# Altium PCB PCBpuissance.PcbDoc
Units mm, origin at the board's own origin, x right, y up, seen from the top; angles counter-clockwise.
Board outline 127 x 101.6 mm, 2 copper layers (Top Layer, Bottom Layer); 28 components, 13 nets, 77 pads, 0 vias.
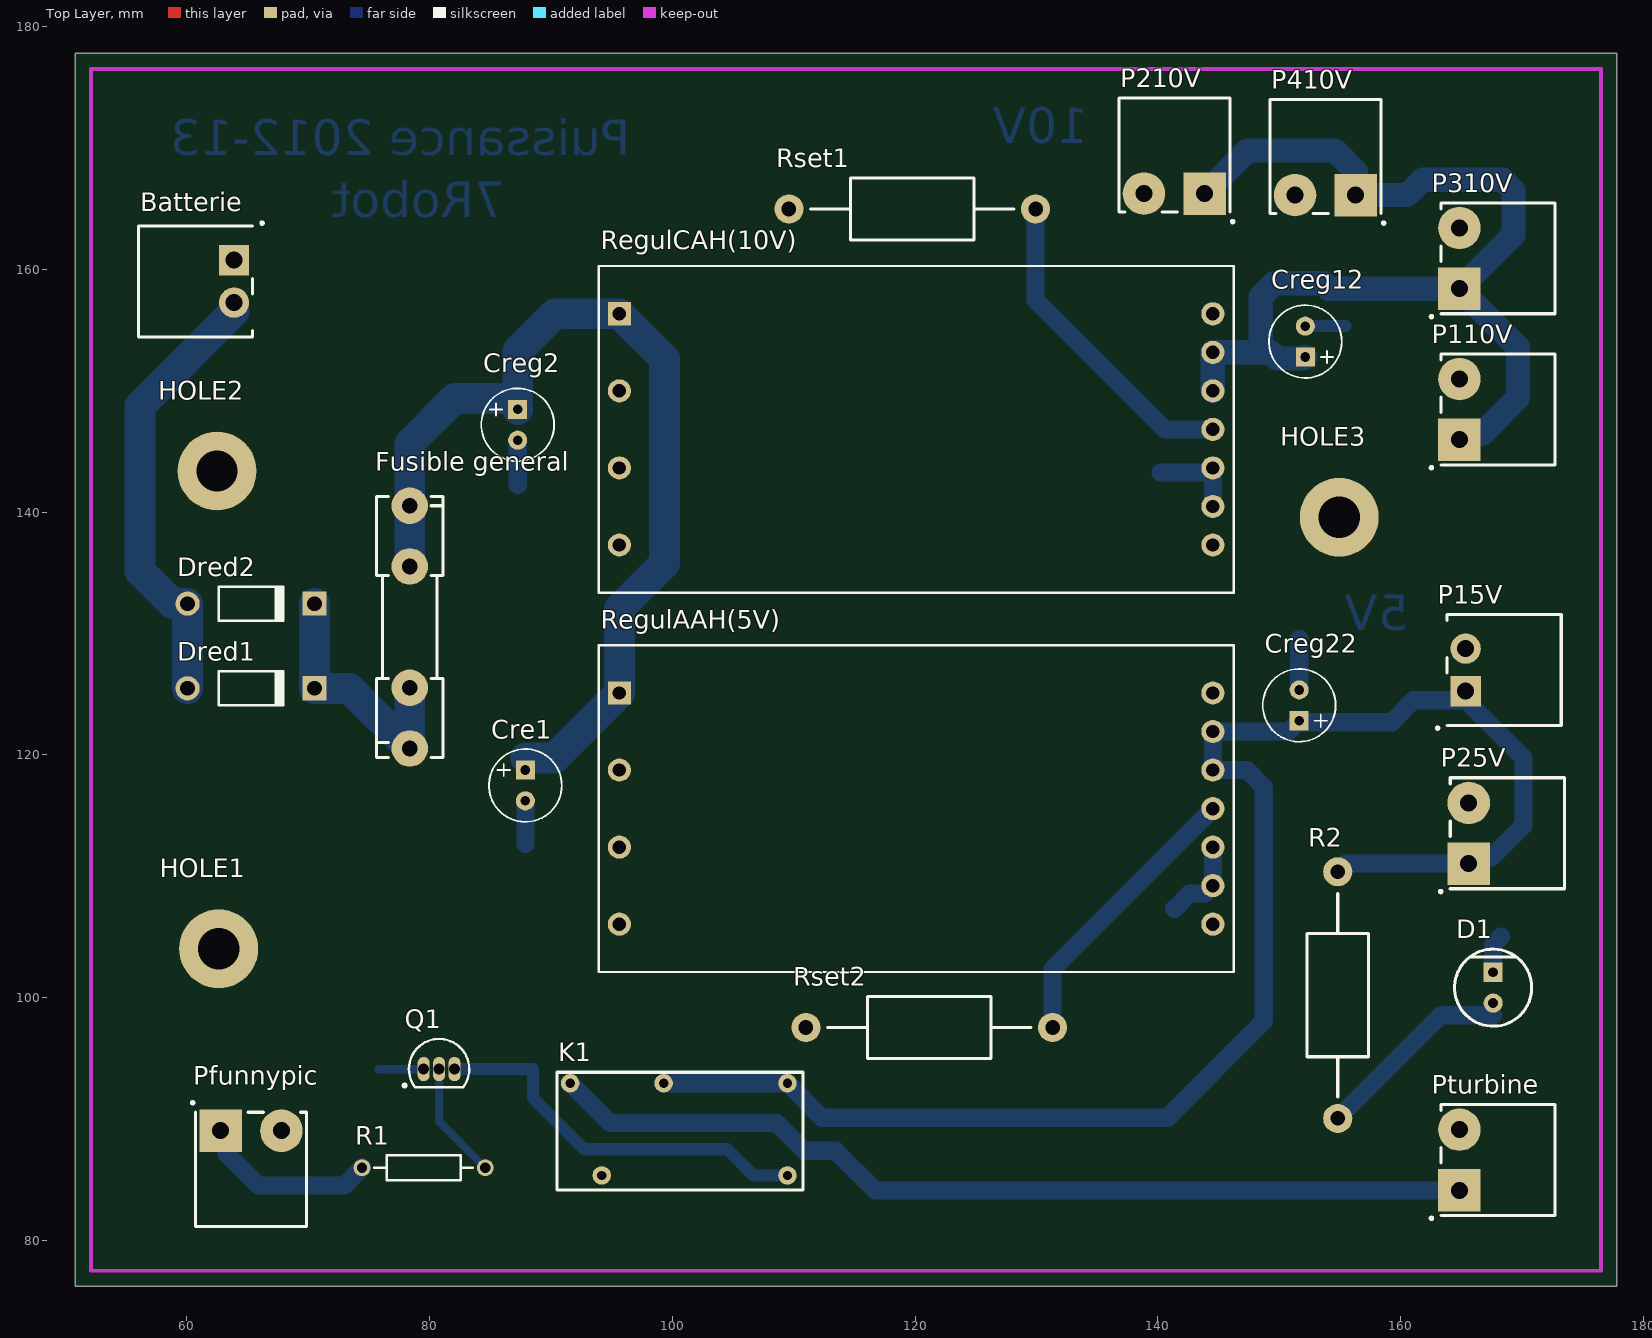
[diagram p0: Top Layer view]
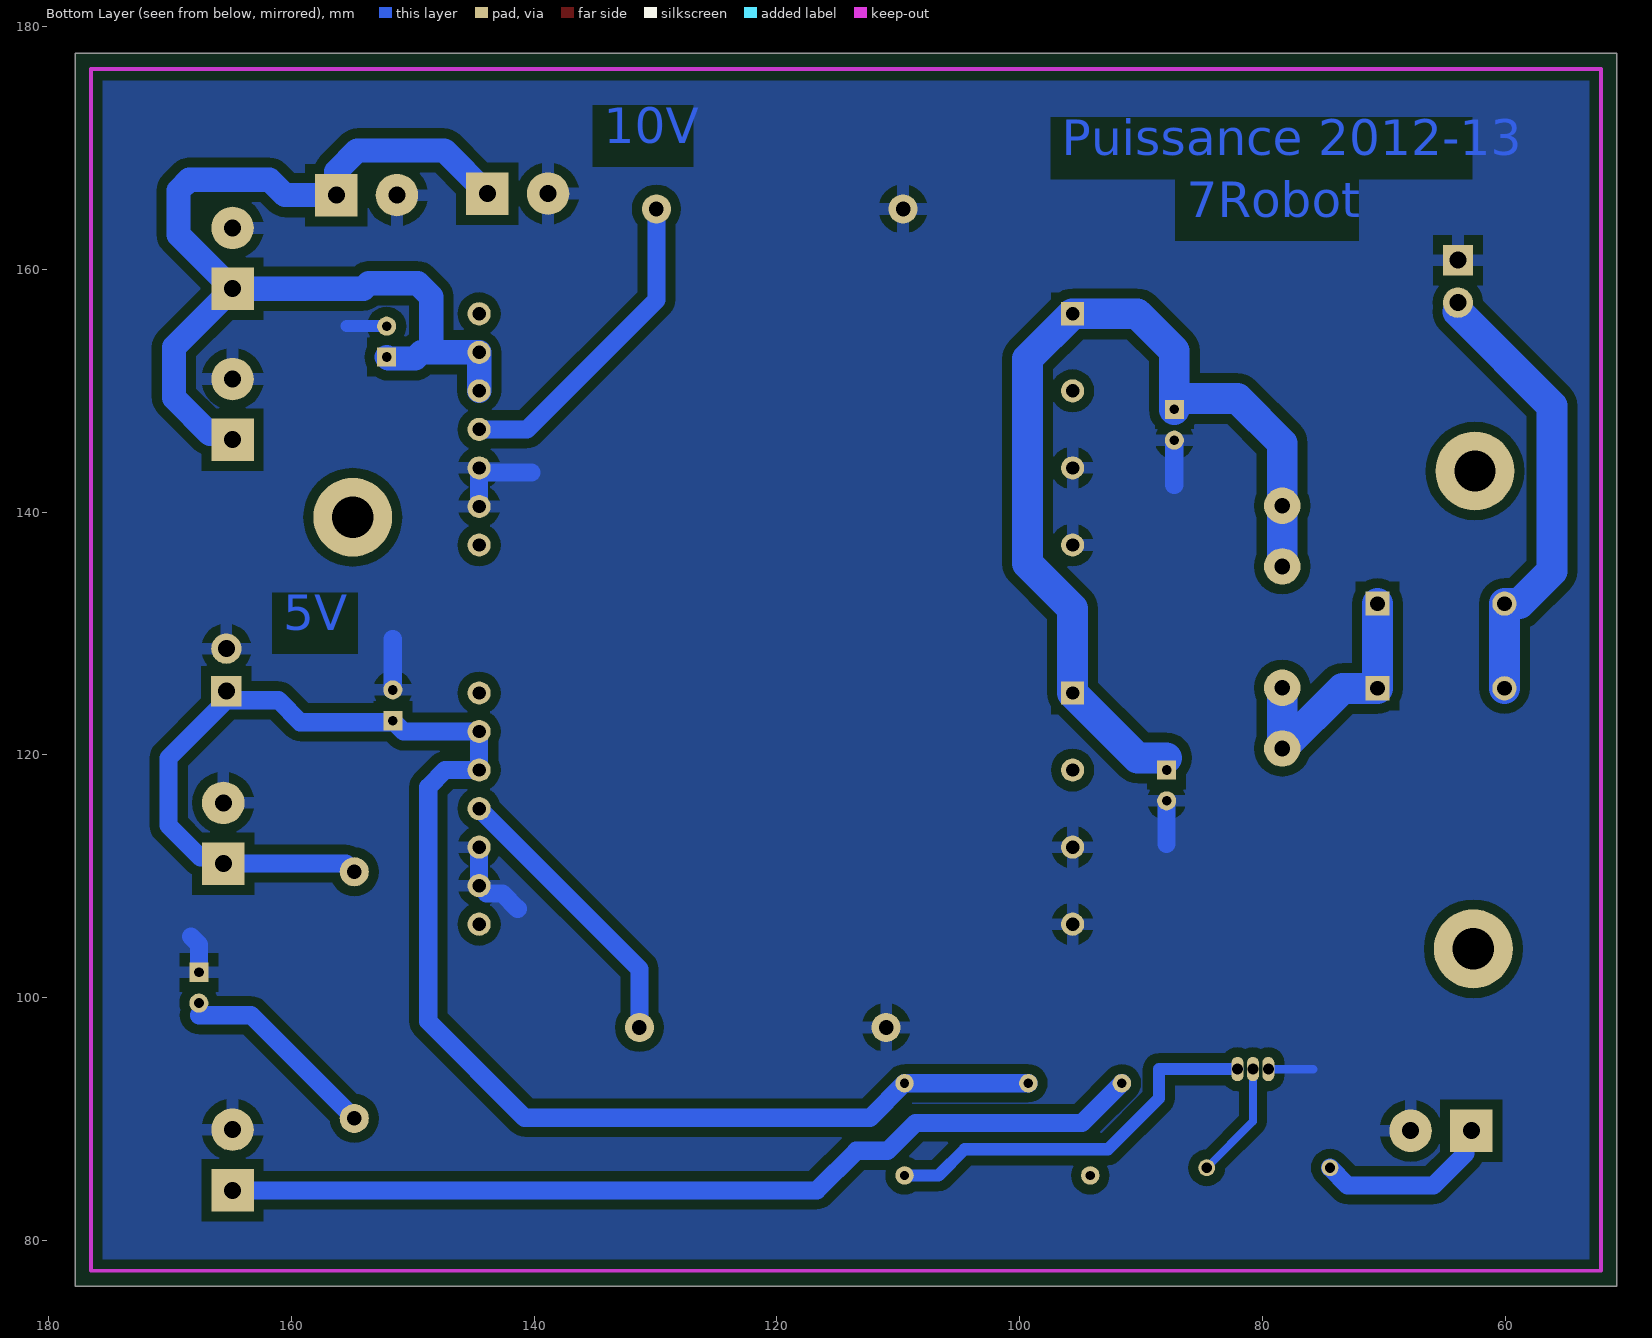
[diagram p1: Bottom Layer view, seen from below]

## Layer stack, top to bottom
Top Layer: signal copper 0.0356
Dielectric: dielectric 0.32, FR-4, Dk 4.8
Bottom Layer: signal copper 0.0356

## Board outline
50.8,76.2 177.8,76.2 177.8,177.8 50.8,177.8

## Design rules (kind name [scope] priority, off if disabled: settings)
Clearance [All] p1: gap=0.3
PolygonConnect [All] p1: connectstyle=Relief reliefconductorwidth=1 reliefentries=4 polygonreliefangle="90 Angle"
RoutingLayers [All] p1: top layer_v5=FALSE bottom layer_v5=TRUE
RoutingVias [All] p1: holewidth=0.8 width=2 viastyle="Through Hole" minholewidth=0.711 minwidth=1.27 maxholewidth=0.711 maxwidth=1.27
SilkscreenOverComponentPads [All] p1: minsilkscreentomaskgap=0.254
SolderMaskExpansion [All] p1: expansion=0.102
Width [All] p1: maxlimit=3 minlimit=0.5 preferedwidth=0.5
26 further rules are at their usual default settings.

## Components (designator, comment, footprint, x,y, rotation, side; value= is the part's Value field where it differs from the comment)
Batterie "bornier" "Bornier male coude 2 voies"#1 63.881,159.004 r270 top
Cre1 "CAP Pol" RB.1/.3 87.884,118.745 r90 top
Creg2 "CAP Pol" RB.1/.3 87.249,148.463 r90 top
Creg12 "CAP Pol" RB.1/.3 152.146,152.781 r270 top
Creg22 "CAP Pol" RB.1/.3 151.638,122.809 r270 top
D1 "LED" "LED 5mm red (dip)" 167.767,100.584 r90 top
Dred1 "Diode 1N4001" DO-41 65.278,125.476 r0 top
Dred2 "Diode 1N4001" DO-41 65.278,132.461 r0 top
"Fusible general" "Fuse" "Fuse Holder 5x20mm" 78.359,120.523 r90 top
HOLE1 "Hole" SCREW 62.611,104.013 r0 top
HOLE2 "Hole" SCREW 62.484,143.383 r0 top
HOLE3 "Hole" SCREW 154.94,139.573 r0 top
K1 "Relay-SPDT" RELAY-SPST 109.474,85.344 r0 top
P15V "Header 2" "Bornier male coude 2 voies"#1 165.354,127 r90 top
P25V "Header 2" "Bornier male coude 2 voies"#2 165.608,113.538 r90 top
P110V "Header 2" "Bornier male coude 2 voies"#2 164.846,148.463 r90 top
P210V "Header 2" "Bornier male coude 2 voies"#2 141.351,166.243 r180 top
P310V "Header 2" "Bornier male coude 2 voies"#2 164.846,160.909 r90 top
P410V "Header 2" "Bornier male coude 2 voies"#2 153.797,166.116 r180 top
Pfunnypic "Header 2" "Bornier male coude 2 voies"#2 65.278,89.027 r0 top
Pturbine "turbine" "Bornier male coude 2 voies"#2 164.846,86.614 r90 top
Q1 "2N3904" TO-92A 80.772,94.107 r270 top
R1 "Res2" AXIAL-0.4 79.502,85.979 r0 top
R2 "RES" AXIAL0.8 154.813,110.363 r270 top
RegulAAH(5V) "PTB78560x" PTB78560x 95.631,125.095 r0 top
RegulCAH(10V) "PTB78560x" PTB78560x 95.631,156.337 r0 top
Rset1 "RES" AXIAL0.8 109.601,164.973 r0 top
Rset2 "RES" AXIAL0.8 110.998,97.536 r0 top

## Footprints (in the part's own frame and the unit in brackets; to place one, negate y for a bottom-side part, rotate by r counter-clockwise, add the part's x,y. Pads: shape width x height; smd on the part's side, far side on the other; paste and mask are expansions set on the pad)
AXIAL0.8 [mm]
  round 2.4 hole 1.2: 1(0,0) 2(20.32,0)
  silkscreen extent 1.78,-2.54 18.54,2.54
AXIAL-0.4 [mm] "Axial Device, Thru-Hole; 2 Leads; 0.4 in Pin Spacing"
  round 1.4 hole 0.85: 1(-5.08,0) 2(5.08,0)
  silkscreen extent -4.06,-1.02 4.06,1.02
"Bornier male coude 2 voies"#1 [mm] "Bornier male coude 2 voies 12A. Pas 5mm (model : CTB9350/2A) -- 3D FAUSSE"
  rect 2.5x2.5 hole 1.4: 1(-1.75,0)
  round 2.5 hole 1.4: 2(1.75,0)
  silkscreen extent -4.9,-7.87 4.57,2.41, body extent -4.2,-7.93 4.2,1.27, height 7.25
"Bornier male coude 2 voies"#2 [mm] "Bornier male coude 2 voies 12A. Pas 5mm (model : CTB9350/2A) -- 3D FAUSSE"
  rect 3.5x3.5 hole 1.4: 1(-2.5,0)
  round 3.5 hole 1.4: 2(2.5,0)
  silkscreen extent -4.9,-7.87 4.57,2.41, body extent -4.2,-7.93 4.2,1.27, height 7.25
DO-41 [mm] "Diode, Axial; Body 5.2 x 2.7 mm (LxDia. max), Lead Dia. 0.86 mm (max)"
  round 2 hole 1.2: 1(-5.23,0)
  rect 2x2 hole 1.2: 2(5.23,0)
  silkscreen extent -2.65,-1.4 2.75,1.4
"Fuse Holder 5x20mm" [mm] "Schurter Fuse Holder 0751.0110"
  round 3 hole 1.3: 1(0,0) 1(5,0) 2(15,0) 2(20,0)
  silkscreen extent -0.75,-2.75 20.75,2.75, body extent -0.51,-3.1 20.58,3.1, height 9.86
"LED 5mm red (dip)" [mil] "LED 5mm red (dip) straight"
  round 62 hole 32: A(-40.94,5.91)
  rect 62x62 hole 32: K(59.06,5.91)
  silkscreen extent -116,-119 134,131, body extent -104,-106 124,122, height 925
PTB78560x [mm] "PTB78560x Texas Instruments Regulator"
  rect 1.905x1.905 hole 1.1: 1(0,0)
  round 1.905 hole 1.1: 2(0,-6.35) 3(0,-12.7) 4(0,-19.05) 5(48.895,-19.05) 6(48.895,-15.875) 7(48.895,-12.7) 8(48.895,-9.525) 9(48.895,-6.35) 10(48.895,-3.175) 11(48.895,0)
  silkscreen extent -1.71,-22.99 50.61,3.94, body extent -1.71,-22.99 50.61,3.94, height 10
RB.1/.3 [mil]
  rect 62x62 hole 31.5: 1(0,0)
  round 62 hole 31.5: 2(-100,0)
  silkscreen extent -168,-118 68,118
RELAY-SPST [mil]
  round 60 hole 30: 1(-401.57,299.21) 2(-602.36,0) 3(-704.72,299.21) 4(0,299.21) 5(0,0)
  silkscreen extent -748,-47 51,335
SCREW [mm] "Mounting Hole M3"
  round 6.5 hole 3.4: 1(0,0)
  body extent -2.89,-2.52 2.89,2.52, height 10
TO-92A [mm] "TO, Flat Index; 3 In-Line, Axial Leads; Body Dia. 4.5mm; Leads 0.51 x 0.48 mm (max)"
  oval 2x1 hole 0.9: 1(0,-1.27) 2(0,0) 3(0,1.27)
  silkscreen extent -2.48,-2.95 1.5,2.48, body extent -2.5,-2.5 1.5,2.5, height 6.86

## Part data
Batterie Pturbine: library part "Header 2", "Header, 2-Pin"
Cre1 Creg2 Creg12 Creg22: "Polarized Capacitor"
D1: "Typical LED"
Dred1 Dred2: "1 Amp General Purpose Rectifier"
"Fusible general": library part FUSE
HOLE1 HOLE2 HOLE3: "Mounting Hole for screws"
K1: "Single-Pole Dual-Throw Relay"
P15V P25V P110V P210V P310V P410V Pfunnypic: "Header, 2-Pin"
Q1: "NPN General Purpose Amplifier"
R1 R2 Rset1 Rset2: "Resistor"
RegulAAH(5V) RegulCAH(10V): "Texas Instruments Regulators"

## Nets (pads, with @x,y where several pads share a name; then routed paths per layer and width w, separated by ;. In a path a pad name is that pad's centre, name@x,y a point inside that pad or via, vN(x,y) a via of type N, cw(c..) or ccw(c..) an arc to the next point about the centre after c; other vN are vias at no path point)
5V: Creg22.1 K1.1 K1.4 P15V.1 P25V.1 R2.1 RegulAAH(5V).9 RegulAAH(5V).10 | length 131.3
  Bottom Layer w1.5: K1.1 K1.4 112.323,90.095 140.768,90.095 148.717,98.044 148.717,117.348 147.32,118.745 144.526,118.745 144.526,121.92 150.749,121.92 151.511,122.682 159.258,122.682 161.076,124.5 165.354,124.5 170.108,119.746 170.108,114.174 167.472,111.538 166.108,111.538 P25V.1 R2.1@155.488,111.038
10V: Creg12.1 P110V.1 P210V.1 P310V.1 P410V.1 RegulCAH(10V).9 RegulCAH(10V).10 | length 90.3
  Bottom Layer w2: P210V.1 147.407,169.799 154.559,169.799 156.297,168.061 P410V.1 160.528,166.116 161.798,167.386 168.402,167.386 169.291,166.497 169.291,162.854 P310V.1 ; 144.526,149.987 144.526,153.162 148.463,153.162 ; Creg12.1 152.019,152.654 149.796,152.654 149.288,153.162 148.463,153.162 ; P110V.1 165.346,146.463 166.71,146.463 169.672,149.425 169.672,153.583 P310V.1 ; 148.463,153.162 148.463,157.734 149.587,158.858 153.611,158.858 154.061,158.409 P310V.1
BAT: "Fusible general.2" Cre1.1 Creg2.1 RegulAAH(5V).1 RegulCAH(10V).1 | length 78.4
  Bottom Layer w2.54: 78.359,135.523 78.359,140.523 78.359,145.669 82.042,149.352 86.36,149.352 ; Creg2.1 87.249,153.289 90.297,156.337 95.631,156.337 99.334,152.634 99.334,135.753 95.631,132.051 95.631,125.095 90.278,119.742 87.884,119.742
GND: Batterie.1 Cre1.2 Creg2.2 Creg12.2 Creg22.2 D1.K P15V.2 P25V.2 P110V.2 P210V.2 P310V.2 P410V.2 Pfunnypic.2 Pturbine.2 Q1.1 RegulAAH(5V).3 RegulAAH(5V).4 RegulAAH(5V).6 RegulAAH(5V).7 RegulCAH(10V).3 RegulCAH(10V).4 RegulCAH(10V).6 RegulCAH(10V).7 Rset1.1 Rset2.1 | length 36.4
  Bottom Layer w0.7: 75.819,94.107 Q1.1
  Bottom Layer w1: Creg12.2 155.448,155.321
  Bottom Layer w1.5: 87.249,142.24 Creg2.2 ; 87.884,112.649 Cre1.2 ; 140.208,143.256 144.145,143.256 144.526,143.637 144.526,140.462 ; 141.351,107.315 142.621,108.585 143.891,108.585 144.526,109.22 144.526,112.395 ; Creg22.2 151.638,129.54 ; D1.K 167.617,104.371 168.275,105.029
NetBatterie_2: Batterie.2 Dred1.1 Dred2.1 | length 36.6
  Bottom Layer w2.54: Dred1.1 Dred2.1 58.801,132.461 56.134,135.128 56.134,148.757 Batterie.2@63.881,156.504
NetD1_A: D1.A R2.2 | length 16.3
  Bottom Layer w1.5: R2.2 163.317,98.547 167.617,98.547
NetDred1_2: "Fusible general.1" Dred1.2 Dred2.2 | length 21.9
  Bottom Layer w2.54: Dred2.2 Dred1.2 73.406,125.476 78.359,120.523 78.359,125.523
NetK1_5: K1.5 Q1.3 | length 32.5
  Bottom Layer w1: Q1.3 88.519,94.107 88.519,91.694 92.71,87.503 104.521,87.503 106.68,85.344 K1.5
NetQ1_2: Q1.2 R1.2 | length 9.7
  Bottom Layer w0.635: Q1.2 80.772,89.789 R1.2
NetRegulAAH(5V)_8: RegulAAH(5V).8 Rset2.2 | length 23.5
  Bottom Layer w1.5: Rset2.2 131.318,102.362 144.526,115.57
NetRegulCAH(10V)_8: RegulCAH(10V).8 Rset1.2 | length 26.5
  Bottom Layer w1.5: Rset1.2 129.921,157.48 140.589,146.812 144.526,146.812
PICFUNNY: Pfunnypic.1 R1.1 | length 14.9
  Bottom Layer w1.5: Pfunnypic.1 63.278,88.527 63.278,87.163 65.914,84.527 72.97,84.527 R1.1
TURBINE: K1.3 Pturbine.1 | length 76.9
  Bottom Layer w1.5: K1.3 94.856,89.662 108.585,89.662 110.871,87.376 113.451,87.376 116.713,84.114 Pturbine.1
pads on no net: HOLE1.1 HOLE2.1 HOLE3.1 K1.2 RegulAAH(5V).2 RegulAAH(5V).5 RegulAAH(5V).11 RegulCAH(10V).2 RegulCAH(10V).5 RegulCAH(10V).11

## Polygon pours and split planes (outlines as drawn)
GND on Bottom Layer "Top Layer-No Net" (solid, pour order 3): 52.1,176.5 52.1,77.5 176.5,77.5 176.022,77.978 176.022,176.5

## Keep-outs
Keep-Out Layer:
  lines w0.3: 52.1,77.5 52.1,176.5 176.5,176.5 176.5,77.5 52.1,77.5

## Other copper
Bottom Layer:
  text "10V" at 134.239,169.418 h5
  text "Puissance 2012-13" at 96.52,168.402 h5
  text "7Robot" at 86.233,163.322 h5
  text "5V" at 160.655,129.286 h5

## Dimensions
52.1,77.5 to 52.1,176.5 on Mechanical 1
52.1,77.5 to 176.5,77.5 on Mechanical 1